# Altium PCB PCB_微缩车模底板_3_2025-08-08.pcbdoc
Units mil, origin at the board's own origin, x right, y up, seen from the top; angles counter-clockwise.
Board outline 11410 x 8315 mil, 2 copper layers (Top Layer, Bottom Layer); 86 components, 79 nets, 410 pads, 403 vias.
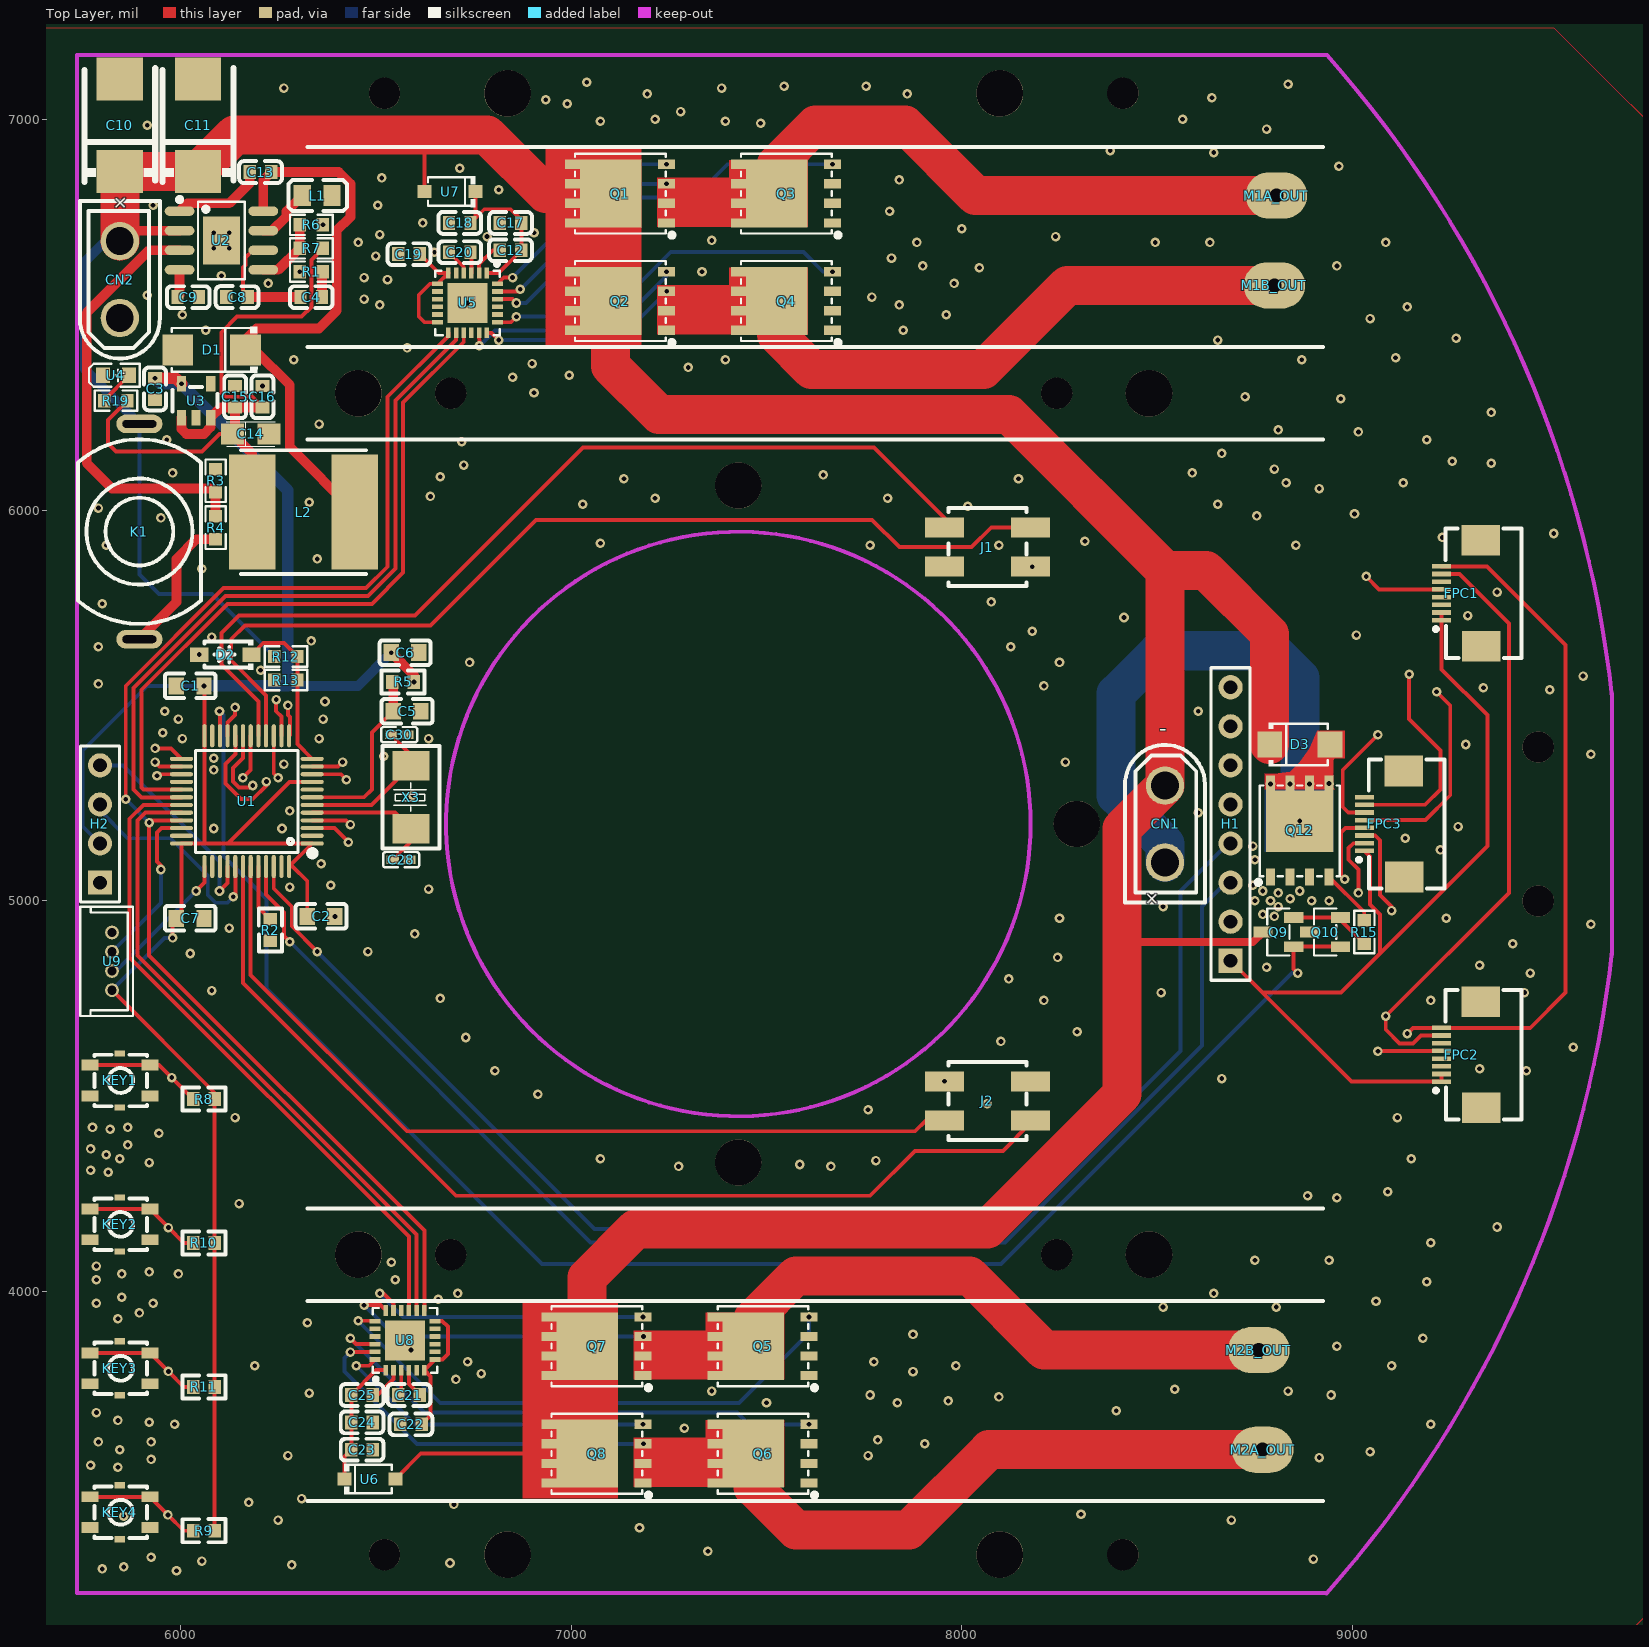
[diagram p0: Top Layer view]
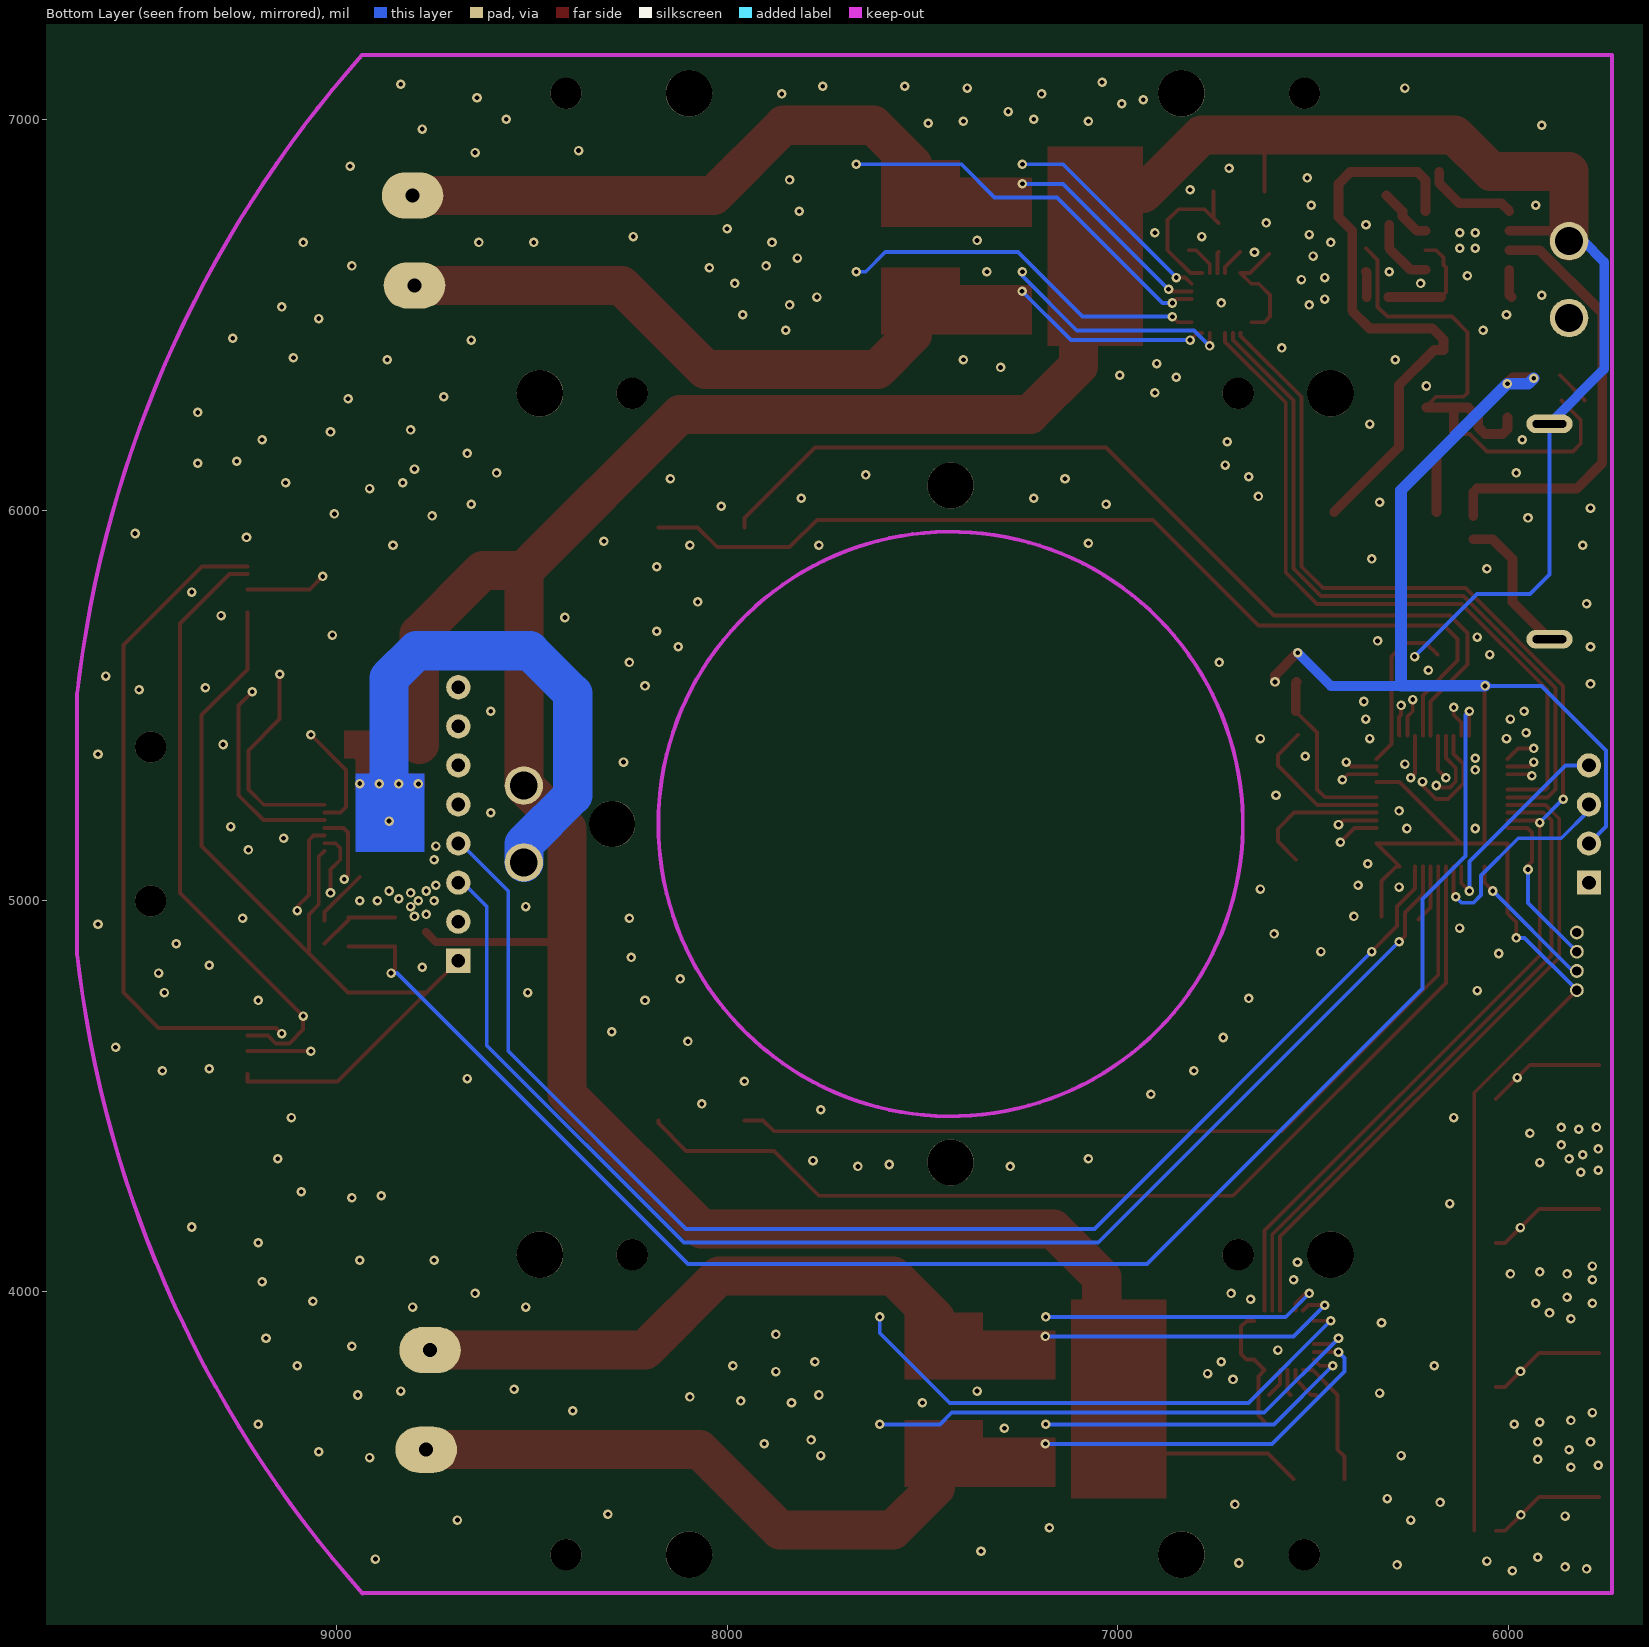
[diagram p1: Bottom Layer view, seen from below]

## Layer stack, top to bottom
Top Layer: signal copper (thickness not stored)
Dielectric: dielectric 12.6, FR-4, Dk 4.8
Bottom Layer: signal copper (thickness not stored)

## Board outline
12410,1000 1000,1000 1000,9315 12410,9315

## Components (designator, comment, footprint, x,y, rotation, side; value= is the part's Value field where it differs from the comment)
C1 "104" C0603#1 6025,5550 r180 top
C2 "104" C0603#1 6360,4960 r0 top
C3 "1uF" C0603#2 5935,6310 r90 top
C4 "1nF" C0603#2 6335,6545 r180 top
C5 "104" C0603#1 6580,5485 r180 top
C6 "104" C0603#1 6575,5635 r180 top
C7 "104" C0603#1 6025,4955 r0 top
C8 "47pF" C0603#2 6145,6545 r0 top
C9 "10nF" C0603#2 6020,6545 r180 top
C10 "100uF (107)" CASE-D_7343 5845,6985 r270 top
C11 "100uF (107)" CASE-D_7343 6045,6985 r270 top
C12 "1u" C0603#2 6845,6665 r0 top
C13 "0.1u" C0603#2 6205,6865 r0 top
C14 "47uf" CASE-A_3216 6180,6195 r0 top
C15 "10uF" C0603#2 6140,6290 r90 top
C16 "0.1u" C0603#2 6210,6290 r90 top
C17 "0.1u" C0603#2 6845,6735 r0 top
C18 "10u" C0603#2 6715,6735 r0 top
C19 "1u" C0603#2 6585,6655 r0 top
C20 "0.1u" C0603#2 6715,6660 r180 top
C21 "0.1u" C0603#2 6585,3735 r0 top
C22 "1u" C0603#2 6590,3660 r0 top
C23 "10u" C0603#2 6465,3595 r180 top
C24 "0.1u" C0603#2 6465,3665 r180 top
C25 "1u" C0603#2 6465,3735 r180 top
C28 "20pF" C0402 6565,5105 r0 top
C30 "20pF" C0402 6560,5425 r0 top
CN1 "XT30UPB-M" CONN-TH_XT30UPB-M 8520,5196.5 r270 top
CN2 "XT30UPB-M" CONN-TH_XT30UPB-M 5845,6590 r90 top
D1 "B340A" SMA_L4.3-W2.6-LS5.1-RD 6080,6410 r180 top
D2 "BZT52C3V3SOD-123" SOD-123_L2.7-W1.6-LS3.7-RD-1 6115,5630 r180 top
D3 "SS54FSH" SMAF_L3.5-W2.6-LS4.7-RD 8865,5400 r0 top
FPC1 "FPC0.5B-WTG-8P" FPC-SMD_8P-P0.50_FPC-05F-8PH20 9278.3,5787.05 r90 top
FPC2 "FPC0.5B-WTG-8P" FPC-SMD_8P-P0.50_FPC-05F-8PH20 9278.3,4605.95 r90 top
FPC3 "FPC0.5B-WTG-8P" FPC-SMD_8P-P0.50_FPC-05F-8PH20 9081.45,5196.5 r90 top
H1 "HDR-F-2.54_1x8" HDR-F-2.54_1X8 8687.75,5146.5 r90 top
H2 "HDR-F-2.54_1x4" HDR-F-2.54_1X4 5794.06,5196.5 r90 top
J1 "贴片排针2*2P" 贴片排针2P 8065.66,5905.16 r180 top
J2 "贴片排针2*2P" 贴片排针2P 8065.66,4487.84 r0 top
K1 "SK-1208YD" SK-1208YD 5895,5945 r0 top
KEY1 "YTSA007A0152501B" SW-SMD_4P-L3.4-W3.4-P2.00-LS4.0_TS3315A160GF 5845,4540 r0 top
KEY2 "YTSA007A0152501B" SW-SMD_4P-L3.4-W3.4-P2.00-LS4.0_TS3315A160GF 5845,4171.67 r0 top
KEY3 "YTSA007A0152501B" SW-SMD_4P-L3.4-W3.4-P2.00-LS4.0_TS3315A160GF 5845,3803.33 r0 top
KEY4 "YTSA007A0152501B" SW-SMD_4P-L3.4-W3.4-P2.00-LS4.0_TS3315A160GF 5845,3435 r0 top
L1 "220Ω" L0805 6350,6805 r180 top
L2 "22uH" IND-SMD_L8.0-W8.0 6315,5995 r0 top
M1A_OUT "WirePad" WIREPAD 8805,6805 r0 top
M1B_OUT "WirePad" WIREPAD 8800,6575 r0 top
M2A_OUT "WirePad" WIREPAD 8770,3595 r0 top
M2B_OUT "WirePad" WIREPAD 8760,3850 r0 top
Q1 "TPH1R403NL-JSM" DFN5X6-8_L5.9-W5.2-P1.27-LS6.2-BL-EP 7125,6810 r90 top
Q2 "TPH1R403NL-JSM" DFN5X6-8_L5.9-W5.2-P1.27-LS6.2-BL-EP 7125,6535 r90 top
Q3 "TPH1R403NL-JSM" DFN5X6-8_L5.9-W5.2-P1.27-LS6.2-BL-EP 7550,6810 r90 top
Q4 "TPH1R403NL-JSM" DFN5X6-8_L5.9-W5.2-P1.27-LS6.2-BL-EP 7550,6535 r90 top
Q5 "TPH1R403NL-JSM" DFN5X6-8_L5.9-W5.2-P1.27-LS6.2-BL-EP 7490,3860 r90 top
Q6 "TPH1R403NL-JSM" DFN5X6-8_L5.9-W5.2-P1.27-LS6.2-BL-EP 7490,3585 r90 top
Q7 "TPH1R403NL-JSM" DFN5X6-8_L5.9-W5.2-P1.27-LS6.2-BL-EP 7065,3860 r90 top
Q8 "TPH1R403NL-JSM" DFN5X6-8_L5.9-W5.2-P1.27-LS6.2-BL-EP 7065,3585 r90 top
Q9 "SS8050-HF" SOT-23-3_L2.9-W1.3-P0.95-LS2.4-BR-1 8810,4920 r0 top
Q10 "MMBT3906K" SOT-23-3_L2.9-W1.3-P1.90-LS2.4-BR 8930,4920 r0 top
Q12 "TPH1R403NL-JSM" DFN5X6-8_L5.9-W5.2-P1.27-LS6.2-BL-EP 8865,5180 r0 top
R1 "30K" R0603#1 6335,6610 r0 top
R2 "10K" R0603#2 6230,4925 r270 top
R3 "100K" R0603#1 6090,6075 r90 top
R4 "300K" R0603#1 6090,5955 r270 top
R5 "10K" R0603#2 6570,5560 r0 top
R6 "5.1k" R0603#1 6335,6730 r180 top
R7 "27K" R0603#1 6335,6670 r0 top
R8 "10K" R0603#2 6060,4492.56 r0 top
R9 "10K" R0603#2 6060,3387.56 r0 top
R10 "10K" R0603#2 6060,4124.23 r0 top
R11 "10K" R0603#2 6060,3755.89 r0 top
R12 "250K" R0603#1 6270,5625 r0 top
R13 "50K" R0603#1 6270,5565 r180 top
R15 "500" R0603#1 9030,4920 r90 top
R19 "1k" R0603#1 5835,6280 r0 top
U1 "MM32F103C8T6" LQFP-48_L7.0-W7.0-P0.50-LS9.0-BL 6170,5255 r90 top
U2 "TPS54331DDAR" SOIC-8_L4.9-W3.9-P1.27-LS6.0-BL-EP 6105,6690 r270 top
U3 "SPX3819-3.3" SOT-23-5_L2.9-W1.6-P0.95-LS2.8-BL 6040,6280 r0 top
U4 "LED" LED0603-FD 5835,6345 r180 top
U5 "DRV8701EVM" VQFN-24_L4.0-W4.0-P0.50-BL-EP2.5 6735,6530 r180 top
U6 "1N5819/SOD-123" SOD-123_L2.7-W1.7-LS3.8-RD 6485,3520 r0 top
U7 "1N5819/SOD-123" SOD-123_L2.7-W1.7-LS3.8-RD 6690,6815 r180 top
U8 "DRV8701EVM" VQFN-24_L4.0-W4.0-P0.50-BL-EP2.5 6575,3875 r0 top
U9 "1.25MM-4P ZZ-MS" CONN-TH_4P-P1.25_1.25MM-4P-ZZ-MS 5825,4845 r270 top
X3 "8MHz" CRYSTAL-SMD_L5.0-W3.2 6590,5265 r270 top

## Footprints (in the part's own frame and the unit in brackets; to place one, negate y for a bottom-side part, rotate by r counter-clockwise, add the part's x,y. Pads: shape width x height; smd on the part's side, far side on the other; paste and mask are expansions set on the pad)
C0402 [mm]
  rect 0.79x0.54 smd paste-100 mask+0.051: 1(-0.545,0) 2(0.545,0)
  silkscreen extent -1.17,-0.5 1.17,0.5
C0603#1 [mm]
  rect 1x1.1 smd paste+0 mask+0.102: 1(-0.9,0) 2(0.9,0)
  silkscreen extent -1.65,-0.8 1.65,0.8
C0603#2 [mm]
  rect 0.8x0.9 smd paste+0 mask+0.051: 1(-0.7,0) 2(0.7,0)
  silkscreen extent -1.39,-0.71 1.39,0.71
CASE-A_3216 [mm]
  rect 1.5x1.359 smd paste+0 mask+0.051: 1(-1.2,0) 2(1.2,0)
  silkscreen extent -1.6,-0.8 1.6,0.8
CASE-D_7343 [mil]
  rect 110.2x118.5 smd paste+0 mask+2: 1(118.11,0) 2(-118.11,0)
  silkscreen extent -146,-91 146,91
CONN-TH_4P-P1.25_1.25MM-4P-ZZ-MS [mm]
  round 0.9 hole 0.6 paste+0 mask+0.05: 1(1.875,0) 2(0.625,0) 3(-0.625,0) 4(-1.875,0)
  silkscreen extent -3.56,-2.07 3.56,1.36
CONN-TH_XT30UPB-M [mm]
  round 2.5 hole 1.8 paste+0 mask+0.051: 1(-2.5,0) 2(2.5,0)
  silkscreen extent -5.14,-2.6 5.1,2.6
CRYSTAL-SMD_L5.0-W3.2 [mm]
  rect 1.9x2.4 smd paste+0 mask+0.051: 1(-2.05,0) 2(2.05,0)
  silkscreen extent -3.32,-1.85 3.33,1.85
DFN5X6-8_L5.9-W5.2-P1.27-LS6.2-BL-EP [mm]
  rect 0.6x1.1 smd paste-100 mask+0.05: 1(-1.905,-3.025) 2(-0.635,-3.025) 3(0.635,-3.025) 4(1.905,-3.025) 5(1.905,3.025) 6(0.635,3.025) 7(-0.635,3.025) 8(-1.905,3.025)
  rect 4.41x4 smd paste-100 mask+0.05: 9(0,0.61)
  silkscreen extent -2.85,-3.53 2.6,2.92
FPC-SMD_8P-P0.50_FPC-05F-8PH20 [mm]
  rect 0.3x1.25 smd paste+0 mask+0.05: 1(-1.75,1.288) 2(-1.25,1.288) 3(-0.75,1.288) 4(-0.25,1.288) 5(0.25,1.288) 6(0.75,1.288) 7(1.25,1.288) 8(1.75,1.288)
  rect 2x2.5 smd paste+0 mask+0.05: 9(3.44,-1.252) 10(-3.44,-1.288)
  silkscreen extent -4.2,-3.91 4.2,1.78
HDR-F-2.54_1X4 [mil]
  rect 62x62 hole 35 paste+0 mask+2: 1(-150,0)
  round 62 hole 35 paste+0 mask+2: 2(-50,0) 3(50,0) 4(150,0)
  silkscreen extent -200,-50 200,50
HDR-F-2.54_1X8 [mil]
  rect 62x62 hole 35 paste+0 mask+2: 1(-300,0)
  round 62 hole 35 paste+0 mask+2: 2(-200,0) 3(-100,0) 4(0,0) 5(100,0) 6(200,0) 7(300,0) 8(400,0)
  silkscreen extent -350,-50 450,50
IND-SMD_L8.0-W8.0 [mm]
  rect 3.024x7.5 smd paste+0 mask+0.051: 1(3.328,0) 2(-3.328,0)
  silkscreen extent -4.08,-4.02 4.08,4.02
L0805 [mil]
  rect 44.59x54.21 smd paste-3937.01 mask+2: 1(-38.05,0) 2(38.04,0)
  silkscreen extent -77,-40 73,40
LED0603-FD [mm]
  rect 0.9x1 smd paste+0 mask+0.051: 1(-0.85,0) 2(0.85,0)
  silkscreen extent -1.55,-0.75 1.75,0.75
LQFP-48_L7.0-W7.0-P0.50-LS9.0-BL [mm]
  oval 0.27x1.5 smd paste+0 mask+0.05: 1(-2.75,-4.25) 2(-2.25,-4.25) 3(-1.75,-4.25) 4(-1.25,-4.25) 5(-0.75,-4.25) 6(-0.25,-4.25) 7(0.25,-4.25) 8(0.75,-4.25) 9(1.25,-4.25) 10(1.75,-4.25) 11(2.25,-4.25) 12(2.75,-4.25) 25(2.75,4.25) 26(2.25,4.25) 27(1.75,4.25) 28(1.25,4.25) 29(0.75,4.25) 30(0.25,4.25) 31(-0.25,4.25) 32(-0.75,4.25) 33(-1.25,4.25) 34(-1.75,4.25) 35(-2.25,4.25) 36(-2.75,4.25)
  oval 1.5x0.27 smd paste+0 mask+0.05: 13(4.25,-2.75) 14(4.25,-2.25) 15(4.25,-1.75) 16(4.25,-1.25) 17(4.25,-0.75) 18(4.25,-0.25) 19(4.25,0.25) 20(4.25,0.75) 21(4.25,1.25) 22(4.25,1.75) 23(4.25,2.25) 24(4.25,2.75) 37(-4.25,2.75) 38(-4.25,2.25) 39(-4.25,1.75) 40(-4.25,1.25) 41(-4.25,0.75) 42(-4.25,0.25) 43(-4.25,-0.25) 44(-4.25,-0.75) 45(-4.25,-1.25) 46(-4.25,-1.75) 47(-4.25,-2.25) 48(-4.25,-2.75)
  silkscreen extent -3.59,-4.46 3.3,3.34
R0603#1 [mil]
  rect 31.75x34.02 smd paste-3937.01 mask+2: 1(-29.65,0) 2(29.65,0)
  silkscreen extent -55,-26 55,26
R0603#2 [mil]
  rect 31.5x35.43 smd paste+0 mask+4: 1(-27.56,0) 2(27.56,0)
  silkscreen extent -55,-30 55,30
SK-1208YD [mm]
  oval 3x1.2 hole 0.5 slot 2.2 at 0 deg paste+0 mask+0.051: 1(0,7) 2(0,-7)
  silkscreen extent -4,-6 4,6
SMA_L4.3-W2.6-LS5.1-RD [mm]
  rect 2x2 smd paste+0 mask+0.051: 1(-2.2,0) 2(2.2,0)
  silkscreen extent -2.98,-1.5 2.6,1.5
SMAF_L3.5-W2.6-LS4.7-RD [mm]
  rect 1.6x1.7 smd paste+0 mask+0.051: 1(-1.96,0) 2(1.96,0)
  silkscreen extent -2.01,-1.43 1.83,1.42
SOD-123_L2.7-W1.6-LS3.7-RD-1 [mm]
  rect 1.2x0.95 smd paste+0 mask+0.051: 1(-1.7,0) 2(1.7,0)
  silkscreen extent -1.81,-0.98 1.35,0.98
SOD-123_L2.7-W1.7-LS3.8-RD [mm]
  rect 0.91x0.84 smd paste+0 mask+0.051: 1(-1.655,0) 2(1.655,0)
  silkscreen extent -1.65,-1 1.43,1
SOIC-8_L4.9-W3.9-P1.27-LS6.0-BL-EP [mm]
  oval 0.602x1.941 smd paste+0 mask+0.051: 1(-1.905,-2.72) 2(-0.635,-2.72) 3(0.635,-2.72) 4(1.905,-2.72) 5(1.905,2.72) 6(0.635,2.72) 7(-0.635,2.72) 8(-1.905,2.72)
  rect 3.098x2.41 smd paste+0 mask+0.051: 9(0,0)
  silkscreen extent -2.81,-2.87 2.53,1.52
SOT-23-3_L2.9-W1.3-P0.95-LS2.4-BR-1 [mm]
  rect 1.25x0.7 smd paste+0 mask+0.051: 1(1,-0.95) 2(1,0.95) 3(-1,0)
  silkscreen extent -0.73,-1.53 0.73,1.53
SOT-23-3_L2.9-W1.3-P1.90-LS2.4-BR [mm]
  rect 1.25x0.7 smd paste+0 mask+0.051: 1(1,-0.95) 2(1,0.95) 3(-1,0)
  silkscreen extent -0.73,-1.53 0.73,1.53
SOT-23-5_L2.9-W1.6-P0.95-LS2.8-BL [mm]
  rect 0.6x1 smd paste+0 mask+0.05: 1(-0.95,-1.1) 2(0,-1.1) 3(0.95,-1.1) 4(0.95,1.1) 5(-0.95,1.1)
  silkscreen extent -1.52,-0.7 1.4,0.89
SW-SMD_4P-L3.4-W3.4-P2.00-LS4.0_TS3315A160GF [mm]
  rect 1.1x0.7 smd paste+0 mask+0.051: 1(-1.95,1) 2(1.95,1) 3(-1.95,-1) 4(1.95,-1)
  rect 0.7x0.4 smd paste+0 mask+0.051: 5(0,1.755) 5(0,-1.755)
  silkscreen extent -1.65,-1.67 1.76,1.68
VQFN-24_L4.0-W4.0-P0.50-BL-EP2.5 [mm]
  rect 0.3x0.7 smd paste-100 mask+0.051: 1(-1.25,-1.942) 2(-0.75,-1.942) 3(-0.25,-1.942) 4(0.25,-1.942) 5(0.75,-1.942) 6(1.25,-1.942) 13(1.25,1.942) 14(0.75,1.942) 15(0.25,1.942) 16(-0.25,1.942) 17(-0.75,1.942) 18(-1.25,1.942)
  rect 0.7x0.3 smd paste-100 mask+0.051: 7(1.948,-1.25) 8(1.948,-0.75) 9(1.948,-0.25) 10(1.948,0.25) 11(1.948,0.75) 12(1.948,1.25) 19(-1.948,1.25) 20(-1.948,0.75) 21(-1.948,0.25) 22(-1.948,-0.25) 23(-1.948,-0.75) 24(-1.948,-1.25)
  rect 2.6x2.6 smd paste-100 mask+0.051: 25(0.001,-0.001)
  silkscreen extent -2.1,-2.67 2.1,2.1
WIREPAD [mm]
  oval 4x3 hole 0.914 paste+0 mask+0.051: 5(0,0)
贴片排针2P [mil]
  rect 100x51.18 smd paste+0 mask+4: 1(-110,50) 2(110,50) 3(-110,-50) 4(110,-50)
  silkscreen extent -100,-100 100,100

## Free pads (board coordinates)
  round 119.37 hole 119.37 unplated paste+0: ""(6455.44,4094.14) ""(6455.44,6298.86) ""(6837.33,3326.42) ""(6837.33,7066.57) ""(8097.17,3326.42) ""(8097.17,7066.57) ""(8479.06,4094.14) ""(8479.06,6298.86)
  round 80 hole 80 unplated paste+0: ""(6522.37,3326.42)
  round 79.92 hole 79.92 unplated paste+0: ""(6522.37,7066.57) ""(6691.66,4094.14) ""(6691.66,6298.86) ""(8242.84,4094.14) ""(8242.84,6298.86) ""(8412.13,3326.42) ""(8412.13,7066.57) ""(9475.15,4999.65) ""(9475.15,5393.35)
  round 118.11 hole 118.11 unplated paste+0: ""(7427.91,4330.36) ""(7427.91,6062.64) ""(8294.05,5196.5)

## Via types
v1: diameter 24.41, hole 12.2, Top Layer to Bottom Layer, tented both sides, 399 vias
v2: diameter 24, hole 12, Top Layer to Bottom Layer, tented both sides, 4 vias

## Nets (pads, with @x,y where several pads share a name; then routed paths per layer and width w, separated by ;. In a path a pad name is that pad's centre, name@x,y a point inside that pad or via, vN(x,y) a via of type N, cw(c..) or ccw(c..) an arc to the next point about the centre after c; other vN are vias at no path point)
+5V: C14.1 C15.1 C16.1 L2.2 R7.2 R19.2 U3.1 U3.3 | length 1747.2
  Top Layer w10: R19.2 5815,6230.34 5815,6170 5835,6150 6055,6150 6100,6195 C14.1 ; C16.1 6210,6265 6185,6290 6115,6290 6105,6300 6105,6455 6145,6495 6310,6495 6335,6520 6335,6640.34 R7.2
  Top Layer w25: U3.1 6002.6,6207.4 6015,6195 6060,6195 6077.4,6212.4 U3.3 6103.15,6262.44 C16.1 ; C15.1 6140,6202.24 C14.1 6183.98,6143.78 L2.2
ADC1: FPC3.6 U1.10 | length 3847.8
  Top Layer w10: U1.10 6411.1,5323.9 v1(6425,5310) ; FPC3.6 8988.98,5226.02 8975,5240 8975,5335 v1(9065,5425)
  Mid-Layer 2 w25: v1(6425,5310) 6475,5360 6475,5650 6990,6165 8240,6165 8980,5425 v1(9065,5425)
ADC2: FPC3.5 U1.11 | length 4214.6
  Top Layer w10: U1.11 6403.58,5343.58 v1(6415,5355) ; FPC3.5 9186.34,5206.34 9250,5270 9250,5500 v1(9215,5535)
  Mid-Layer 2 w25: v1(6415,5355) 6415,5665 6950,6200 8280,6200 8945,5535 v1(9215,5535)
ADCB: D2.1 R12.2 R13.1 U1.12 | length 422.1
  Top Layer w10: D2.1 6211.9,5660 6265,5660 R12.2 ; R12.2 R13.1 6299.66,5400.93 U1.12
C4_1: C4.1 R1.2 | length 65.9
  Top Layer w25: C4.1 6362.56,6607.9 R1.2
C21_1: C21.1 U8.3 | length 66.7
  Top Layer w10: C21.1 6565.16,3742.72 U8.3
C21_2: C21.2 U8.4 | length 75
  Top Layer w10: U8.4 6584.84,3762.72 C21.2
C22_2: C22.2 U8.6 U8.7 U8.12 | length 341.1
  Top Layer w10: C22.2 6640,3682.44 6640,3782.76 U8.6 ; U8.6 U8.7 6670.8,3825.8 6685,3840 6685,3910 6669.2,3924.2 U8.12
C25_1: C25.1 U8.2 | length 92.7
  Top Layer w10: C25.1 6505,3735 6545.47,3775.47 U8.2
CCD1ADC: FPC1.5 U1.13 | length 3448.6
  Top Layer w10: v1(6275,5500) 6275,5475 6280,5470 6280,5424.05 U1.13 ; v1(9035,5830) 9068.11,5796.89 FPC1.5
  Mid-Layer 1 w25: v1(6275,5500) 6925,6150 7975,6150 8295,5830 v1(9035,5830)
CCD2ADC: FPC2.5 U1.14 | length 4455.3
  Top Layer w10: v1(6245,5515) 6245,5485 6258.58,5471.42 U1.14 ; v1(9065,4615) 9065.79,4615.79 FPC2.5
  Mid-Layer 1 w25: v1(6245,5515) 6230,5500 6230,5465 6315,5380 6315,4365 6495,4185 8635,4185 v1(9065,4615)
CCDCLK: FPC1.8 FPC2.8 U1.3 | length 5593.4
  Top Layer w10: U1.3 6393.9,5186.1 v1(6430,5150) ; v1(9140,4660) 9154.84,4674.84 FPC2.8 9454.84,4674.84 9545,4765 9545,5655 9344.06,5855.94 FPC1.8
  Mid-Layer 1 w25: v1(6430,5150) 6430,4335 6535,4230 8565,4230 8995,4660 v1(9140,4660)
CCDSI: FPC1.7 FPC2.7 U1.4 | length 5028.4
  Top Layer w10: U1.4 6424.21,5205.79 v1(6435,5195) ; FPC2.7 9175.17,4655.16 9155,4635 9120,4635 9085,4670 v1(9085,4705) 9400,5020 9400,5710 9273.74,5836.26 FPC1.7
  Mid-Layer 1 w25: v1(6435,5195) 6520,5110 6520,4645 6750,4415 8645,4415 8935,4705 v1(9085,4705)
D3_2: CN1.2 D3.2 Q12.5 Q12.6 Q12.7 Q12.8 Q12.9 | length 1394.2
  Bottom Layer w100: CN1.2 8520,5145 8395,5270 8395,5530 8505,5640 8795,5640 8865,5570 v1(8865,5204.01)
  other v1: 8790,5299.09 8840,5299.09 8890,5299.09 8940,5300
ENC1A: J1.3 U1.16 | length 2506.5
  Top Layer w10: U1.16 6219.2,5525.8 6130,5615 6130,5670 6165,5705 6640,5705 6910,5975 7770,5975 7840,5905 8025,5905 8075.2,5955.2 J1.3
ENC1B: J1.4 U1.17 | length 2448.2
  Top Layer w10: U1.17 6199.5,5510.5 6105,5605 6105,5685 6150,5730 6600,5730 7030,6160 7775,6160 7955.7,5979.3 J1.4
ENC2A: J2.3 U1.43 | length 2230.7
  Top Layer w10: U1.43 6179.8,4810.2 6580,4410 7880,4410 7907.8,4437.8 J2.3
ENC2B: J2.4 U1.42 | length 2623.1
  Top Layer w10: U1.42 6160.2,4789.8 6705,4245 7765,4245 7880,4360 8105,4360 8175.7,4430.7 J2.4
GND: C1.2 C2.2 C3.1 C5.1 C6.1 C7.2 C8.1 C9.1 C10.2 C11.2 C14.2 C15.2 C16.2 C17.1 C18.1 C19.1 C22.1 C23.1 C24.1 C28.2 C30.2 CN2.1 D1.2 D2.2 FPC1.3 FPC1.6 FPC2.3 FPC2.6 FPC3.8 H1.2 H2.1 J1.2 J2.2 KEY1.3 KEY1.4 KEY1.5 KEY2.3 KEY2.4 KEY2.5 KEY3.3 KEY3.4 KEY3.5 KEY4.3 KEY4.4 KEY4.5 L1.1 Q3.1 Q3.2 Q3.3 Q4.1 Q4.2 Q4.3 Q5.1 Q5.2 Q5.3 Q6.1 Q6.2 Q6.3 Q10.3 Q12.1 Q12.2 Q12.3 R1.1 R2.2 R3.2 R6.1 R13.2 U1.8 U1.23 U1.35 U1.47 U2.9 U3.2 U4.2 U5.5 U5.16 U5.20 U5.21 U5.25 U8.5 U8.16 U8.20 U8.21 U8.25 U9.4
  other v1: 5990,3285 5800,3290 5855,3295 6285,3300 6690,3305 6055,3310 8900,3315 5925,3320 7350,3335 7175,3395 6250,3415 8690,3415 5855,3425 8305,3430 6700,3455 6175,3460 6310,3470 5840,3550 5770,3555 5925,3570 8915,3575 6275,3580 7760,3580 9045,3590 5845,3595 7905,3610 5790,3615 5925,3615 7785,3620 7290,3650 5985,3660 9200,3660 5920,3665 5840,3670 5785,3690 8395,3695 7500,3715 7835,3715 7965,3720 8095,3730 7765,3735 8945,3735 6330,3740 7360,3745 8835,3745 8545,3750 6705,3775 6770,3790 7875,3795 6190,3810 7985,3810 9100,3810 6735,3820 7775,3820 6590,3850 8960,3860 9180,3880 7875,3890 6325,3920 5840,3930 5895,3945 8515,3960 8805,3960 5785,3970 5930,3970 9060,3975 6660,3980 5850,3985 6710,3995 8645,3995 9190,4025 5785,4030 6550,4030 5850,4045 5995,4045 5920,4050 5785,4065 6540,4075 8750,4080 8940,4080 9200,4125 9370,4165 6150,4225 8960,4240 8885,4245 9090,4255 5815,4305 5770,4310 7275,4320 7665,4320 7585,4325 5920,4330 7780,4335 5845,4340 7075,4340 9150,4340 5810,4350 5770,4365 5865,4375 5945,4405 5820,4415 5775,4420 5865,4420 6140,4445 9115,4445 7760,4465 8065,4480 6915,4505 8665,4545 6805,4565 9445,4565 9325,4570 9565,4625 8100,4640 6730,4650 8295,4665 8210,4745 9200,4745 6665,4750 8510,4765 9440,4765 6080,4770 8120,4800 9455,4815 8780,4830 9325,4835 8245,4855 6025,4865 6480,4870 9410,4890 6600,4915 6125,4930 9610,4940 8250,4955 9240,4955 6395.44,4960 8800,4960 8770,4965 8515,4985 8810,4985 8750,5000 8790,5000 8895,5000 8940,5000 8840,5005 8810,5020 8770,5025 8865,5025 6635,5030 6280,5035 6385,5040 8745,5040 6360,5095 8750,5105 9225,5130 8745,5140 9135,5160 6085,5185 6260,5185 9270,5190 8605,5225 6280,5230 6595,5270 6085,5335 6265,5350 8265,5355 6085,5365 6520,5370 9610,5375 9290,5400 6005,5415 6355,5415 6635,5415 5955,5430 5995,5465 6365,5465 5960,5485 8605,5485 6370,5510 9505,5540 9335,5545 8210,5550 5790,5555 9590,5575 6205,5590 6740,5610 8250,5610 6048.07,5630 5790,5650 8125,5650 6335,5665 6080,5675 9010,5680 8180,5690 8415,5725 9295,5730 5800,5760 8075,5765 9370,5790 6055,5850 6350,5875 5810,5910 7765,5910 8095,5910 8855,5910 7075,5915 8315,5920 9230,5930 9515,5940 5950,5980 8755,5985 9005,5990 5790,6005 8015,6010 7030,6015 8655,6015 6330,6020 7215,6030 7810,6030 6640,6035 8915,6055 8830,6070 9130,6070 7135,6080 8145,6080 6665,6085 7645,6090 5980,6095 8590,6095 8800,6105 6725,6115 9355,6120 9255,6125 8665,6145 6720,6175 5965,6180 9190,6180 9015,6200 8810,6205 6355,6220 9355,6250 8970,6285 8725,6290 6905,6300 6210,6317.56 6850,6340 6995,6345 7300,6365 6900,6375 6290,6385 7395,6385 8870,6385 9110,6390 6580,6415 8655,6435 9265,6440 6065,6460 7850,6460 9045,6490 6005,6500 7960,6500 9140,6520 6510,6525 7840,6525 6734.97,6530.03 6470,6540 7770,6545 5915,6550 6225,6580 7980,6580 6530,6590 6470,6595 6105,6600 6305.34,6610 7335,6610 8045,6620 7900,6625 8960,6625 7820,6645 6500,6650 6650,6660 6455,6685 7885,6685 8495,6685 8635,6685 9085,6685 7360,6690 6785,6700 8240,6700 6510,6705 6905,6710 8000,6720 6364.66,6730 6620,6735 7815,6765 5930,6780 6505,6780 6815,6820 7840,6845 6515,6850 6715,6875 8965,6880 8645,6915 8380,6920 8780,6975 5915,6985 7485,6990 7075,6995 7395,6995 7215,7000 8565,7000 7280,7020 6990,7040 6935,7050 8640,7055 7195,7065 7860,7065 6265,7080 7385,7080 7545,7085 7755,7085 8835,7090 7040,7095
  other v2: 6085.31,6670.31 6124.68,6670.31 6085.31,6709.68 6124.68,6709.68
GRYOD: H1.4 U1.46 | length 3544.4
  Top Layer w10: U1.46 6238.9,5031.1 6285,4985 6285,4935 v1(6350,4870)
  Bottom Layer w10: v1(6350,4870) 7060,4160 8105,4160 8560,4615 8560,5025 8681.5,5146.5 H1.4
GYROC: H1.3 U1.45 | length 3534.2
  Top Layer w10: U1.45 6219.2,5015.8 6265,4970 6265,4910 v1(6280,4895)
  Bottom Layer w10: v1(6280,4895) 7050,4125 8110,4125 8615,4630 8615,4985 8676.5,5046.5 H1.3
KEY1: KEY1.1 KEY1.2 R8.1 U1.18 | length 1258.8
  Top Layer w10: KEY1.1 KEY1.2 5945.63,4579.37 v1(5977.58,4547.43) R8.1 ; v1(6160,5315) 6179.84,5334.84 U1.18
  Mid-Layer 1 w10: v1(5977.58,4547.43) 6160,4729.85 v1(6160,5315)
KEY2: KEY2.1 KEY2.2 R10.1 U1.19 | length 1707.1
  Top Layer w10: KEY2.1 KEY2.2 v1(5969.37,4163.44) 6008.58,4124.23 R10.1 ; U1.19 6160.16,5365.16 6135,5340 6135,5305 6150,5290 6180,5290 v1(6185,5295)
  Mid-Layer 1 w10: v1(5969.37,4163.44) 6185,4379.07 v1(6185,5295)
KEY3: KEY3.1 KEY3.2 R11.1 U1.20 | length 2192.7
  Top Layer w10: KEY3.1 KEY3.2 5969.22,3795.26 6008.58,3755.89 R11.1 ; U1.20 6140.47,5375.47 6115,5350 6115,5300 6155,5260 6185,5260 6220,5295 v1(6220,5305)
  Mid-Layer 1 w10: v1@5969.22,3795.25 6205,4031.03 6205,5270 6220,5285 v1(6220,5305)
  other v1: 5969.22,3795.25
KEY4: KEY4.1 KEY4.2 R9.1 U1.15 | length 2415.8
  Top Layer w10: KEY4.1 KEY4.2 v1(5968.07,3428.07) 6008.58,3387.56 R9.1 ; U1.15 6238.9,5326.1 v1(6250,5315)
  Mid-Layer 1 w10: v1(5968.07,3428.07) 6225,3685 6225,5215 6250,5240 v1(6250,5315)
LED_SET: FPC3.7 U1.21 | length 4360.3
  Top Layer w10: U1.21 6120.79,5455.79 6140,5475 v1(6140,5495) ; FPC3.7 9185.71,5245.71 9225,5285 9225,5385 9145,5465 v1(9145,5580)
  Mid-Layer 2 w25: v1(6140,5495) 6140,5765 6610,6235 8325,6235 8980,5580 v1(9145,5580)
M1A_OUT: M1A_OUT.5 Q1.1 Q1.2 Q1.3 Q3.5 Q3.6 Q3.7 Q3.8 Q3.9 U5.23 | length 2017.1
  Top Layer w10: U5.23 6864.52,6559.52 v1(6870,6565)
  Top Layer w100: Q3.9 7526,6886 7625,6985 7855,6985 8035,6805 M1A_OUT.5
  Bottom Layer w10: v1(6870,6565) 7140,6835 v1(7244.09,6835)
M1B_OUT: M1B_OUT.5 Q2.1 Q2.2 Q2.3 Q4.5 Q4.6 Q4.7 Q4.8 Q4.9 U5.18 | length 2006.2
  Top Layer w10: U5.18 6796.46,6453.54 v1(6815,6435)
  Top Layer w100: Q4.9 7526,6449 7615,6360 8055,6360 8270,6575 M1B_OUT.5
  Bottom Layer w10: v1(6815,6435) 7120,6435 v1(7245,6560)
M1H: U1.29 U5.15 | length 1827
  Top Layer w10: U1.29 5905.5,5284.5 5900,5290 5900,5540 6120,5760 6490,5760 6570,5840 6570,6275 6725.2,6430.2 U5.15
M1L: U1.30 U5.14 | length 1855.3
  Top Layer w10: U1.30 5900.2,5264.8 5880,5285 5880,5545 6115,5780 6480,5780 6550,5850 6550,6280 6705.5,6435.5 U5.14
M2A_OUT: M2A_OUT.5 Q6.5 Q6.6 Q6.7 Q6.8 Q6.9 Q8.1 Q8.2 Q8.3 U8.23 | length 2481.2
  Top Layer w10: v1(6435,3845) U8.23
  Top Layer w100: Q6.9 7466,3499 7575,3390 7865,3390 8070,3595 M2A_OUT.5
  Bottom Layer w10: v1(6435,3845) 6420,3830 6420,3795 6605,3610 v1(7185,3610)
M2B_OUT: M2B_OUT.5 Q5.5 Q5.6 Q5.7 Q5.8 Q5.9 Q7.1 Q7.2 Q7.3 U8.18 | length 2298.4
  Top Layer w10: v1(6470,3965) 6512.24,3965 U8.18
  Top Layer w100: Q5.9 7465.98,3930.99 7575,4040 8020,4040 8210,3850 M2B_OUT.5
  Bottom Layer w10: v1(6470,3965) 6550,3885 v1(7185,3885)
M2H: U1.31 U8.15 | length 1701.9
  Top Layer w10: U1.31 5905.2,5245.2 5870,5210 5870,4855 6584.8,4140.2 U8.15
M2L: U1.32 U8.14 | length 1670.6
  Top Layer w10: U1.32 5910.5,5225.5 5890,5205 5890,4860 6604.5,4145.5 U8.14
M3_PWM: Q9.1 Q10.1 U1.22 | length 4255.5
  Top Layer w10: v1(6100,5485) 6101.1,5483.9 U1.22 ; v1(8860,4815) 8849.37,4825.63 Q9.1 Q10.1
  Bottom Layer w10: v1(6100,5485) 6110,5475 6110,5115 6220,5005 6220,4775 6925,4070 8100,4070 8845,4815 v1(8860,4815)
MEN: U1.33 U5.13 U8.13 | length 3462.9
  Top Layer w10: v1(5860,5260) 5860,5550 6110,5800 6475,5800 6530,5855 6530,6290 6685.8,6445.7 U5.13 ; U1.33 5920,5205.8 v1(5920,5200) 5920,4860 6624.2,4155.8 U8.13
  Bottom Layer w10: v1(5860,5260) v1(5920,5200)
OLEDC: H2.3 U1.41 | length 569.7
  Top Layer w10: v1(6135,5010) 6140.47,5015.47 U1.41
  Bottom Layer w10: H2.3 5794.06,5230.94 5865,5160 5975,5160 6070,5065 6070,5015 6090,4995 6120,4995 v1(6135,5010)
OLEDD: H2.4 U1.40 | length 554.3
  Top Layer w10: v1(6100,5025) 6120.79,5045.79 U1.40
  Bottom Layer w10: H2.4 5853.5,5346.5 6100,5100 v1(6100,5025)
OSCIN: C28.1 U1.5 X3.2 | length 368.3
  Top Layer w10: U1.5 6548.82,5225.47 X3.2 6590,5151.46 C28.1
OSCOUT: C30.1 U1.6 X3.1 | length 394.9
  Top Layer w10: U1.6 6489.45,5245.16 X3.1 6590,5373.54 C30.1
OUT1: FPC3.4 U1.25 | length 4461.2
  Top Layer w10: v1(5935,5390) 5975.95,5390 U1.25 ; v1(8980,5055) 8970,5065 8970,5175 8981.66,5186.65 FPC3.4
  Mid-Layer 2 w25: v1(5935,5390) 5950,5390 6185,5155 6185,4870 6875,4180 8025,4180 8595,4750 8875,4750 8980,4855 v1(8980,5055)
OUT2: FPC3.3 U1.26 | length 4781.6
  Top Layer w10: v1(5935,5355) 5946.42,5343.58 U1.26 ; FPC3.3 9058,5167 9070,5155 9070,5015 9100,4985 v1(9100,4975)
  Mid-Layer 2 w25: v1(5935,5355) 5925,5355 5900,5330 5900,5225 5875,5200 5875,4915 5965,4825 6100,4825 6840,4085 8070,4085 8650,4665 8900,4665 9100,4865 v1(9100,4975)
OUT3: FPC3.2 U1.27 | length 4437.4
  Top Layer w10: v1(5940,5320) 5943.9,5323.9 U1.27 ; v1(9015,5020) 9015,5080 8990,5105 8990,5135 9002.28,5147.28 FPC3.2
  Mid-Layer 2 w25: v1(5940,5320) 6005,5255 6005,4985 6855,4135 8035,4135 8610,4710 8895,4710 9015,4830 v1(9015,5020)
Q9_2: Q9.2 Q10.2 R15.1 | length 212.2
  Top Layer w10: Q9.2 Q10.2 8969.37,4950.97 R15.1
R4_2: K1.2 R4.2 | length 365.8
  Top Layer w25: K1.2 5990,5764.41 5990,5875 6040.34,5925.34 R4.2
R15_2: Q12.4 R15.2 | length 148.5
  Top Layer w10: Q12.4 9030,4970.9 R15.2
S$11404: 
S$11582: 
S$12241: 
S$13145: 
S$13335: 
SCLK: U1.37 U9.2 | length 371.4
  Top Layer w10: v1(6040,5025) 6061.73,5046.73 U1.37
  Bottom Layer w10: U9.2 5835.39,4820.39 v1(6040,5025)
SDIO: U1.34 U9.3 | length 428.6
  Top Layer w10: v1(5950,5080) 5950,5090 5940,5100 5940,5175 5951.1,5186.1 U1.34
  Bottom Layer w10: U9.3 5950,4994.61 v1(5950,5080)
U1_7: C5.2 R5.1 U1.7 | length 459.5
  Top Layer w10: U1.7 6469.84,5264.84 6490,5285 6490,5430.44 C5.2
  Top Layer w25: R5.1 6544.56,5557.88 C5.2
U1_44: R2.1 U1.44 | length 147.7
  Top Layer w10: U1.44 6199.53,4983.03 R2.1
U2_1: C13.1 U2.1 | length 237.1
  Top Layer w25: U2.1 6017.89,6785 6125,6785 6177.44,6837.44 C13.1
U2_3: R3.1 R4.1 U2.3 | length 1110.8
  Top Layer w25: U2.3 5920,6665 5760,6505 5760,6120 5825,6055 6080.34,6055 R3.1 R4.1
U2_4: C9.2 U2.4 | length 72.3
  Top Layer w25: C9.2 5997.89,6550.45 U2.4
U2_5: R6.2 R7.1 U2.5 | length 176
  Top Layer w25: U2.5 6250.34,6615 R7.1 R6.2
U2_6: C4.2 C8.2 U2.6 | length 297.5
  Top Layer w10: C8.2 6160,6557.56 6160,6620.92 6166.64,6627.56 6166.64,6646.64 6185,6665 U2.6
  Top Layer w25: C8.2 C4.2
U2_7: L1.2 U2.7 | length 144.8
  Top Layer w25: U2.7 6235,6715 6271.46,6751.46 6271.46,6764.5 L1.2
U2_8: C13.2 D1.1 L2.1 U2.8 | length 1497.7
  Top Layer w25: U2.8 6212.11,6844.55 C13.2 6405,6865 6435,6835 6435,6750 6400,6715 6400,6510 6355,6465 6195,6465 6166.6,6436.6 D1.1 6190,6410 6280,6320 6280,6161 L2.1
U4_1: R19.1 U4.1 | length 91.1
  Top Layer w10: R19.1 5805.34,6281.88 U4.1
U5_1: C12.2 C17.2 C18.2 U5.1 U7.1 | length 431.2
  Top Layer w10: U7.1 6755.16,6747.6 C18.2 6777.56,6770 6845,6770 6872.56,6742.44 C17.2 C12.2 6814.01,6606.45 U5.1
U5_2: C12.1 U5.2 | length 90.7
  Top Layer w10: U5.2 6764.53,6629.53 6800,6665 C12.1
U5_3: C20.1 U5.3 | length 54.5
  Top Layer w10: C20.1 6744.84,6657.72 U5.3
U5_4: C20.2 U5.4 | length 69.2
  Top Layer w10: C20.2 6725.16,6622.28 U5.4
U5_12: C19.2 U5.6 U5.7 U5.12 | length 301.7
  Top Layer w10: C19.2 6661.11,6606.45 U5.6 ; U5.12 6624.21,6480.79 6610,6495 6610,6550 6639.21,6579.21 U5.7 U5.6
U5_17: Q2.4 U5.17 | length 597.7
  Top Layer w10: U5.17 v1(6765,6420)
  Bottom Layer w10: v1(6765,6420) 6805,6460 7105,6460 7244.1,6599.1 v1(7244.09,6610)
U5_19: Q4.4 U5.19 | length 952.3
  Top Layer w10: U5.19 6845.79,6480.79 v1(6860,6495)
  Bottom Layer w10: v1(6860,6495) 7090,6495 7255,6660 7595,6660 7645,6610 v1(7669.1,6610)
U5_22: Q3.4 U5.22 | length 1008.5
  Top Layer w10: U5.22 6850.16,6539.84 v1(6860,6530)
  Bottom Layer w10: v1(6860,6530) 6885,6530 7155,6800 7315,6800 7400,6885 v1(7669.1,6885)
U5_24: Q1.4 U5.24 | length 559.1
  Top Layer w10: U5.24 6827.49,6595 v1(6850,6595)
  Bottom Layer w10: v1(6850,6595) 7140,6885 v1(7244.09,6885)
U6_1: C23.2 C24.2 C25.2 U6.1 U8.1 | length 337
  Top Layer w10: U6.1 6419.84,3577.4 C23.2 C25.2 6500.99,3798.55 U8.1
U8_17: Q7.4 U8.17 | length 763
  Top Layer w10: v1(6510,3995) 6520,3995 6545.47,3969.53 U8.17
  Bottom Layer w10: v1(6510,3995) 6570,3935 v1(7184.09,3935)
U8_19: Q5.4 U8.19 | length 1399.5
  Top Layer w10: v1(6455,3925) U8.19
  Bottom Layer w10: v1(6455,3925) 6665,3715 7430,3715 7609.1,3894.1 v1(7609.1,3935)
U8_22: Q6.4 U8.22 | length 1334.7
  Top Layer w10: v1(6435,3880) 6449.84,3865.16 U8.22
  Bottom Layer w10: v1(6435,3880) 6625,3690 7425,3690 7455,3660 v1(7609.1,3660)
U8_24: Q8.4 U8.24 | length 851.1
  Top Layer w10: v1(6450,3810) 6482.51,3810 U8.24
  Bottom Layer w10: v1(6450,3810) 6600,3660 v1(7184.09,3660)
VBAT: C10.1 C11.1 CN1.1 CN2.2 D3.1 K1.1 Q1.5 Q1.6 Q1.7 Q1.8 Q1.9 Q2.5 Q2.6 Q2.7 Q2.8 Q2.9 Q7.5 Q7.6 Q7.7 Q7.8 Q7.9 Q8.5 Q8.6 Q8.7 Q8.8 Q8.9 Q9.3 R12.1 U2.2 U6.2 U7.2 | length 9679.9
  Top Layer w10: U6.2 6615.16,3585 Q8.9 ; 6624.5,6960 U7.2
  Top Layer w20: 8410,4894.16 8744.79,4894.16 Q9.3
  Top Layer w25: CN2.2 5871.57,6715 U2.2
  Top Layer w100: CN2.2 C10.1 C11.1 6138.1,6960 6785,6960 6935,6810 Q1.9 ; Q7.9 7041,4036 7165,4160 8065,4160 8410,4505 8410,5184.9 CN1.1 8520,5845 ; Q2.9 7101,6369 7225,6245 8120,6245 8520,5845 ; D3.1 8787.8,5682.2 8625,5845 8520,5845
  Bottom Layer w10: K1.1 5895,5835 5945,5785 6080.34,5785 v1(6240.34,5625)
  Bottom Layer w25: CN2.2 5808.4,6688.4 5755,6635 5755,6360.6 K1.1
VCC3.3: C1.1 C2.1 C3.2 C6.2 C7.1 FPC1.1 FPC1.2 FPC2.1 FPC2.2 FPC3.1 H1.1 H2.2 J1.1 J2.1 R5.2 R8.2 R9.2 R10.2 R11.2 U1.1 U1.9 U1.24 U1.36 U1.48 U3.5 U9.1 | length 12700.7
  Top Layer w10: U9.1 6087.56,4508.62 R8.2 R9.2 ; v1(5980,4905) 5980,4945.44 C7.1 6002.68,4968.11 U1.36 ; U1.36 6061.7,5146.7 U1.24 ; C1.1 v1(6060,5550) 6061.73,5548.27 U1.24 ; U1.48 U1.1 U1.36 ; U1.48 6287.3,5087.7 6324.6,5050.4 C2.1 ; U1.9 6279.21,5304.21 6121.73,5146.73 U1.36 ; H1.1@8687.7,4846.5 8769.2,4765 8970,4765 ; H1.1 8997.2,4537.05 FPC2.1 FPC2.2 ; 8774.8,4765 8970,4765 ; FPC3.1 9045,5113.4 9045,4990 9070,4965 9070,4865 8970,4765 ; FPC1.1 FPC1.2 ; FPC1.1 9227.6,5592.4 9345,5475 9345,5140 8970,4765
  Top Layer w25: v1(6539.57,5635) 6597.56,5577 v1(6597.56,5560)
  Top Layer w30: v1(5935,6337.56) 5988.35,6337.56 v1(6002.6,6323.31)
  Mid-Layer 1 w25: v1(6597.56,5560) 7012.56,5975 7765,5975 7885,5855 v1(8180,5855) 8405,5630 8405,4895 8453.5,4846.5 H1.1 8379.09,4537.84 v1(7955.67,4537.84)
  Bottom Layer w10: H2.2 5750,5190.55 5750,5385 5915,5550 v1(6060,5550) ; U9.1 5958.82,4905 v1(5980,4905)
  Bottom Layer w25: v1(6060,5550) 6454.56,5550 v1(6539.57,5635)
  Bottom Layer w30: v1(5935,6337.56) 5949.25,6323.31 v1(6002.6,6323.31) 6275,6050.91 6275,5550 v1(6060,5550)
pads on no net: FPC1.4 FPC1.9 FPC1.10 FPC2.4 FPC2.9 FPC2.10 FPC3.9 FPC3.10 H1.5 H1.6 H1.7 H1.8 U1.2 U1.28 U1.38 U1.39 U3.4 U5.8 U5.9 U5.10 U5.11 U8.8 U8.9 U8.10 U8.11

## Polygon pours and split planes (outlines as drawn)
GND on Bottom Layer (solid): 3115,8815 3525,8405 10910,8405 10595,8090 10595,1500 10020,2075 3575,2075
GND on Mid-Layer 2 (solid): 1575,8610 1610,8575 11910,8575 11185,7850 11185,1500 10185,2500 3725,2500
GND on Mid-Layer 1 (solid): 1500,8370 1630,8240 11300,8240 10430,7370 10430,2035 10095,2370 3910,2370
GND on Top Layer (solid): 5450,7365 5580,7235 9515,7235 9905,6845 9905,3325 9415,2835 4965,2835

## Keep-outs
Keep-Out Layer:
  circle w10 net S$13145: c7427.91,5196.5 r748.03
  lines w10 net S$12241: 8933.08,3227.2 ccw(c6719.2,5196.47) 9664.36,4871.93 ; 8934.29,7164.41 cw(c6719.2,5196.5) 9664.36,5521.01

## Other copper
Top Layer:
  region net D3_2: 8775,5285 8955,5285 8950,5290 8950,5360 8955,5365 8980,5365 8980,5435 8910,5435 8890,5390 8865,5355 8840,5330 8800,5325 8775,5325
  region net M2A_OUT: 7160,3625 7160,3500 7545,3500 7545,3670 7345,3670 7345,3625
  region net M2B_OUT: 7160,3900 7160,3775 7545,3775 7545,3945 7345,3945 7345,3900
  region net M1B_OUT: 7220,6575 7220,6450 7605,6450 7605,6620 7405,6620 7405,6575
  region net M1A_OUT: 7220,6850 7220,6725 7605,6725 7605,6895 7405,6895 7405,6850
  rectangle net VBAT: 6935,6420 7180,6930
  rectangle net VBAT: 6875,3470 7120,3980
Bottom Layer:
  region net D3_2: 8775,5325 8950,5325 8950,5125 8775,5125

## Silkscreen, mask and mechanical layers (free items; w line width, h text height)
Top Overlay:
  lines w10 net S$13335: 6325.52,3463.93 8923.91,3463.93 ; 6325.52,3975.73 8923.97,3975.73 ; 6325.52,4212 7782.63,4212 8923.93,4212 ; 6325.52,6180.7 6876.32,6180.7 8923.92,6180.7 ; 6325.52,6416.97 8923.94,6416.97 ; 6325.52,6928.78 8923.97,6928.78

## Text inside footprints (layer, text, board x,y; h text height)
CN1: Top Overlay "-" at 8505,5421.81 h39.37; Top Overlay "+" at 8513.92,5000.42 h39.37 r135
CN2: Top Overlay "-" at 5860,6364.68 h39.37 r180; Top Overlay "+" at 5851.08,6813.91 h39.37 r225